# Altium PCB Valve.PcbDoc
Units mm, origin at the board's own origin, x right, y up, seen from the top; angles counter-clockwise.
Board outline 70.25 x 100.25 mm, 2 copper layers (Top Layer, Bottom Layer); 67 components, 49 nets, 227 pads, 31 vias.
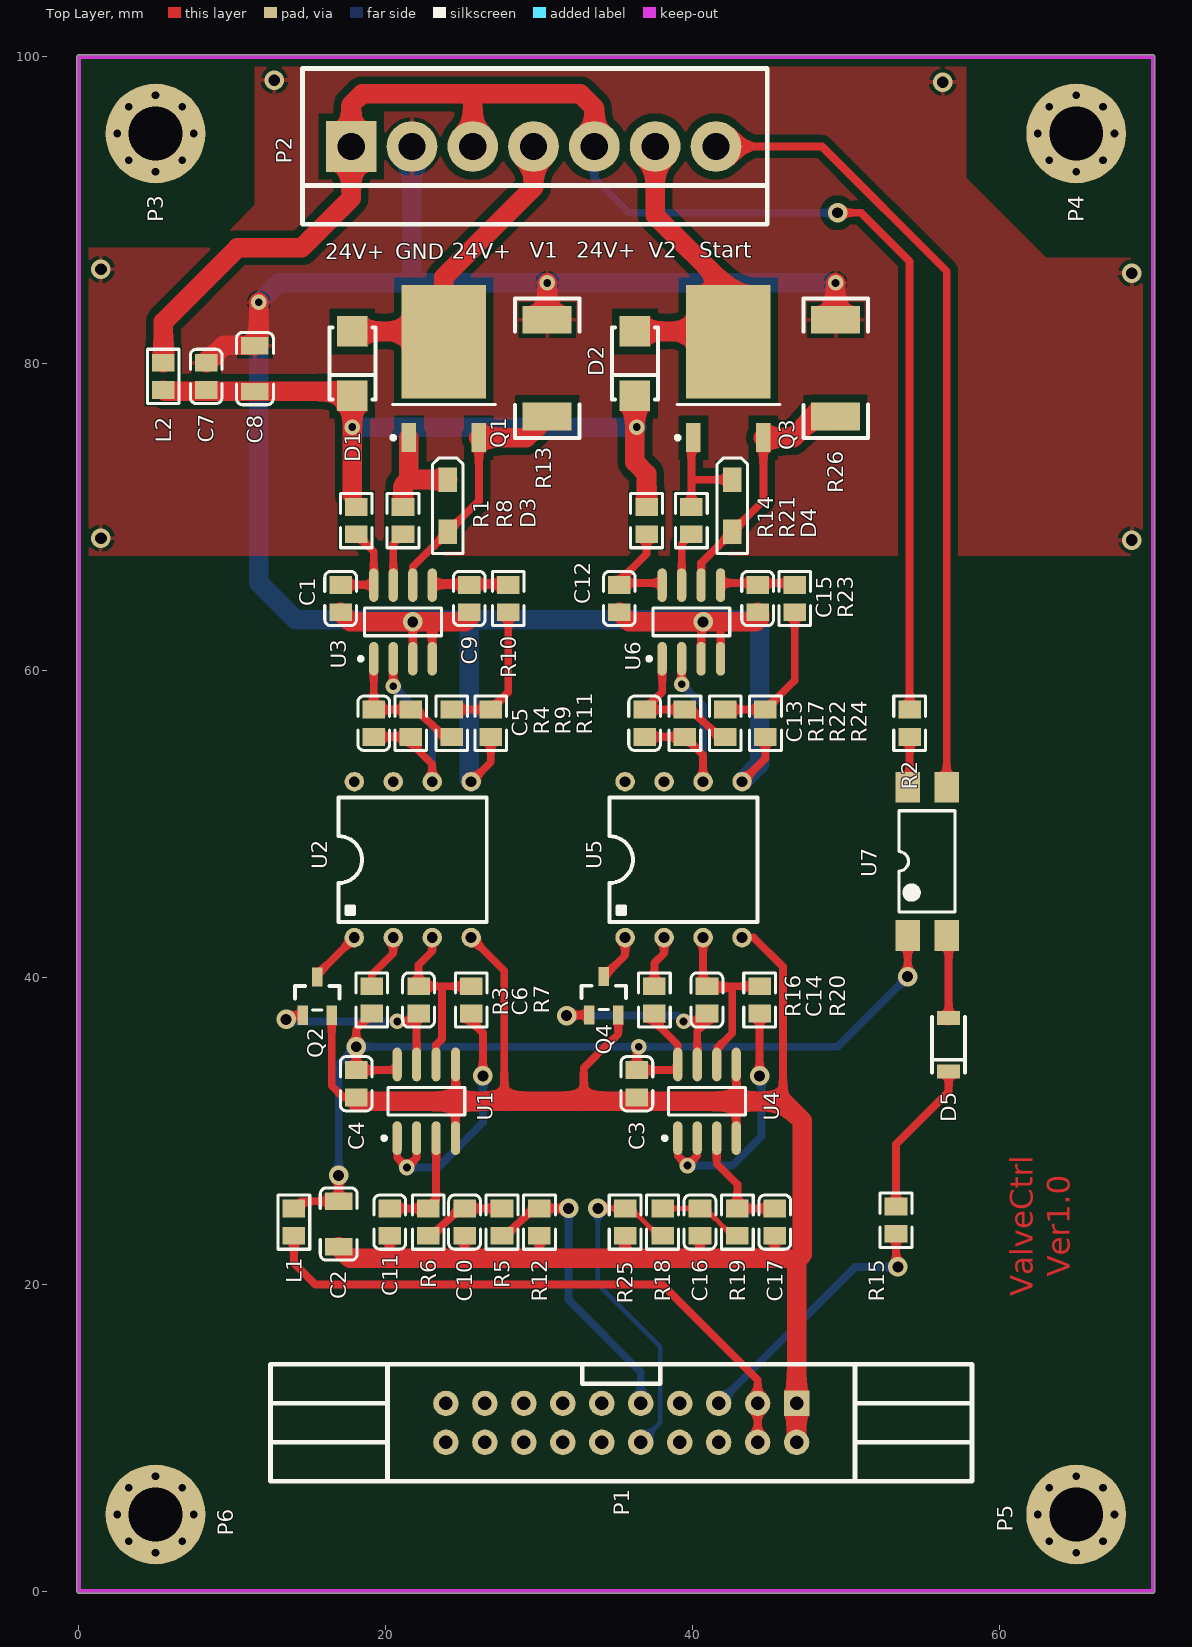
[diagram p0: Top Layer view]
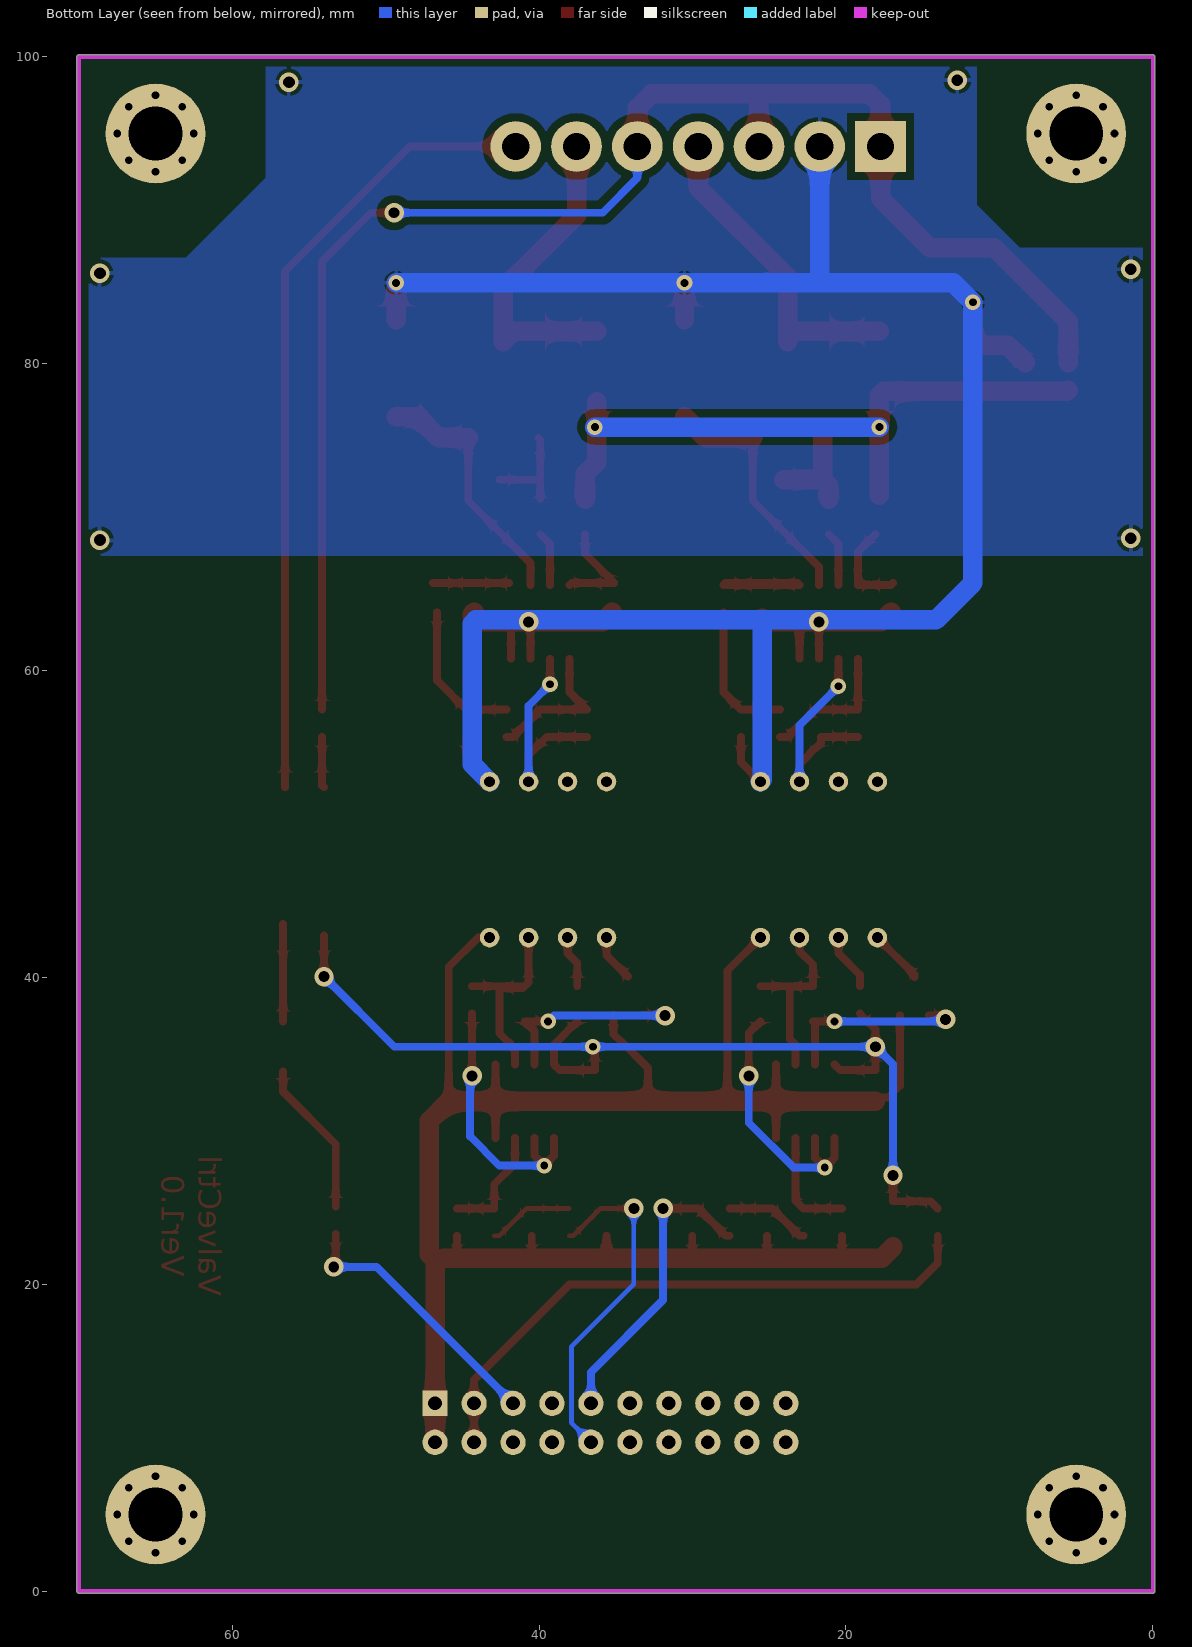
[diagram p1: Bottom Layer view, seen from below]
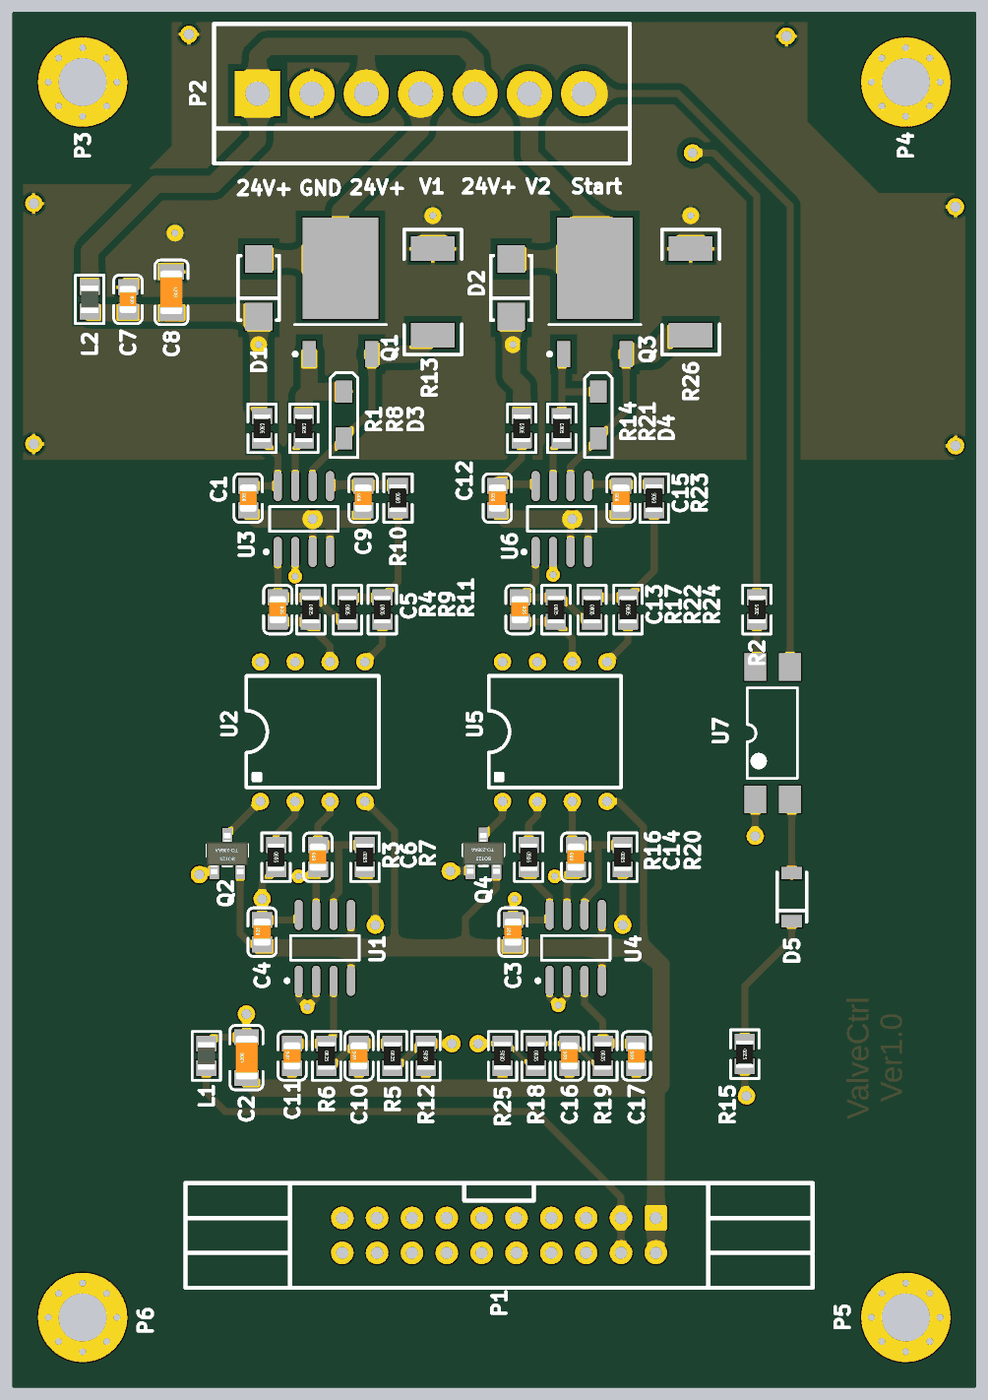
[diagram p2: 3D render of the assembled board from above, using the file's embedded part models]

## Layer stack, top to bottom
Top Solder: solder mask 0.0102, Solder Resist, Dk 3.5
Top Layer: signal copper 0.0356
Dielectric1: dielectric 0.32, FR-4, Dk 4.8
Bottom Layer: signal copper 0.0356
Bottom Solder: solder mask 0.0102, Solder Resist, Dk 3.5

## Board outline
-0.127,0 ccw(c0,0) 0,-0.127 70,-0.127 ccw(c70,0) 70.127,0 70.127,100 ccw(c70,100) 70,100.127 0,100.127 ccw(c0,100) -0.127,100

## Design rules (kind name [scope] priority, off if disabled: settings)
Clearance Clearance_1 [InPolygon] p1: gap=0.508
Clearance [All] p2: gap=0.254
ComponentClearance [All] p1: gap=0 collisioncheckmode=3 verticalgap=0 showdistances=FALSE
PolygonConnect [All] p1: connectstyle=Relief reliefconductorwidth=0.254 reliefentries=4 polygonreliefangle="90 Angle" airgapwidth=0.254
RoutingVias [All] p1: holewidth=0.711 width=1.27 viastyle="Through Hole" minholewidth=0.508 minwidth=1.016 maxholewidth=0.711 maxwidth=2.54
SilkToSolderMaskClearance SilkscreenOverComponentPads [IsPad] p1: minsilkscreentomaskgap=0.254 clearancetoexposedcopper=TRUE
SolderMaskExpansion [All] p1: expansion=0.102
Width [All] p1: maxlimit=2.54 minlimit=0.254 preferedwidth=0.254
28 further rules are at their usual default settings.

## Components (designator, comment, footprint, x,y, rotation, side; value= is the part's Value field where it differs from the comment)
C1 "100nF" 0805_C 17.064,64.695 r90 top
C2 "10uF" 1206_C 16.937,23.927 r90 top
C3 "100nF" 0805_C 36.368,33.07 r90 top
C4 "100nF" 0805_C 18.08,33.07 r90 top
C5 "1nF" 0805_C 19.223,56.567 r270 top
C6 "1nF" 0805_C 22.144,38.531 r90 top
C7 "100nF" 0805_C 8.301,79.171 r270 top
C8 "10uF" 1206_C 11.476,79.68 r270 top
C9 "10nF" 0805_C 25.446,64.695 r90 top
C10 "100nF" 0805_C 25.141,24.054 r90 top
C11 "100nF" 0805_C 20.264,24.054 r90 top
C12 "100nF" 0805_C 35.225,64.695 r90 top
C13 "1nF" 0805_C 36.876,56.567 r270 top
C14 "1nF" 0805_C 40.94,38.531 r90 top
C15 "10nF" 0805_C 44.242,64.695 r90 top
C16 "100nF" 0805_C 40.483,24.054 r90 top
C17 "100nF" 0805_C 45.36,24.054 r90 top
D1 "M7" SMA(DO-214AC)_S1 17.826,80.007 r90 top
D2 "M7" SMA(DO-214AC)_S1 36.241,80.007 r90 top
D3 "SMF12" SOD-123 24.049,69.041 r90 top
D4 "SMF12" SOD-123 42.591,69.041 r90 top
D5 "LL4148" LL-34 56.688,35.611 r90 top
L1 "GZ2012D101TF" 0805_L 14.016,24.054 r90 top
L2 "GZ2012D101TF" 0805_L 5.507,79.171 r90 top
P1 "Header 10X2" IDC20-EJ 46.782,12.243 r180 top
P2 "Header 7" 3.96-7 17.75,94.158 r180 top
P3 "Header 9" LK 5,95 r0 top
P4 "Header 9" LK 65,95 r0 top
P5 "Header 9" LK 65,5 r0 top
P6 "Header 9" LK 5,5 r0 top
Q1 "IRLR024N" TO-252AA_N 23.795,79.68 r90 top
Q2 "MMBT5551  G1" SOT-23(SOT-23-3) 15.54,38.786 r270 top
Q3 "IRLR024N" TO-252AA_N 42.337,79.68 r90 top
Q4 "MMBT5551  G1" SOT-23(SOT-23-3) 34.209,38.806 r270 top
R1 "100Ω" 0805_R 18.08,69.775 r270 top
R2 "1KΩ" 0805_R 54.148,56.565 r90 top
R3 "100Ω" 0805_R 19.096,38.531 r270 top
R4 "100K" 0805_R 21.636,56.567 r270 top
R5 "100K" 0805_R 27.58,24.054 r270 top
R6 "100K" 0805_R 22.779,24.054 r270 top
R7 "51KΩ" 0805_R 25.573,38.531 r270 top
R8 "100K" 0805_R 21.128,69.775 r270 top
R9 "5.1KΩ" 0805_R 24.303,56.567 r270 top
R10 "100K" 0805_R 27.986,64.695 r90 top
R11 "10KΩ" 0805_R 26.843,56.567 r270 top
R12 "100K" 0805_R 30.018,24.054 r90 top
R13 "33R" R2512 30.526,82.855 r270 top
R14 "100Ω" 0805_R 37.003,69.775 r270 top
R15 "330Ω" 0805_R 53.259,24.181 r270 top
R16 "100Ω" 0805_R 37.511,38.531 r270 top
R17 "100K" 0805_R 39.501,56.567 r270 top
R18 "100K" 0805_R 38.044,24.054 r270 top
R19 "100K" 0805_R 42.921,24.054 r270 top
R20 "51KΩ" 0805_R 44.369,38.531 r270 top
R21 "100K" 0805_R 39.924,69.775 r270 top
R22 "5.1KΩ" 0805_R 42.125,56.567 r270 top
R23 "100K" 0805_R 46.655,64.694 r90 top
R24 "10KΩ" 0805_R 44.75,56.567 r270 top
R25 "100K" 0805_R 35.606,24.054 r90 top
R26 "33R" R2512 49.322,82.855 r270 top
U1 "LM2904D" 751-02_N 22.652,31.928 r90 top
U2 "HCNR201" DIP-8-1 17.953,42.596 r90 top
U3 "LM2904VQDR" 751-02_N 21.128,63.17 r90 top
U4 "LM2904D" 751-02_N 40.94,31.928 r90 top
U5 "HCNR201" DIP-8-1 35.606,42.596 r90 top
U6 "LM2904VQDR" 751-02_N 39.924,63.17 r90 top
U7 "TLP785(GB-TP6,F(C" TLP785(LF6) 55.291,47.565 r90 top

## Footprints (in the part's own frame and the unit in brackets; to place one, negate y for a bottom-side part, rotate by r counter-clockwise, add the part's x,y. Pads: shape width x height; smd on the part's side, far side on the other; paste and mask are expansions set on the pad)
3.96-7 [mil]
  rect 130x130 hole 70: 1(0,0)
  round 130 hole 70: 2(-156,0) 3(-312,0) 4(-468,0) 5(-624,0) 6(-780,0) 7(-936,0)
  silkscreen extent -1068,-200 125,200
751-02_N [mm] "SOIC, 8-Leads, Body 4.9x3.9mm, Pitch 1.27mm, IPC Medium Density"
  oval 2.2x0.6 smd: 1(-2.4,1.905) 2(-2.4,0.635) 3(-2.4,-0.635) 4(-2.4,-1.905) 5(2.4,-1.905) 6(2.4,-0.635) 7(2.4,0.635) 8(2.4,1.905)
  silkscreen extent -2.52,-2.5 0.9,2.88, body extent -1.95,-2.45 1.95,2.45, height 1.75
0805_C [mm]
  rect 1.16x1.47 smd: 1(-0.89,0) 2(0.89,0)
  silkscreen extent -1.77,-1.04 1.77,1.04, body extent -1,-0.62 1,0.63, height 0.77
0805_L [mm]
  rect 1.16x1.47 smd: 1(-0.89,0) 2(0.89,0)
  silkscreen extent -1.77,-1.04 1.77,1.03, body extent -1.02,-0.64 1.03,0.64, height 0.6
0805_R [mm]
  rect 1.16x1.47 smd: 1(-0.89,0) 2(0.89,0)
  silkscreen extent -1.77,-1.04 1.77,1.03, body extent -1,-0.62 1,0.63, height 0.49
1206_C [mm]
  rect 1.13x1.8 smd: 1(-1.49,0) 2(1.49,0)
  silkscreen extent -2.36,-1.2 2.35,1.2, body extent -1.6,-0.81 1.6,0.79, height 1
DIP-8-1 [mil]
  round 50 hole 28: 1(0,0) 2(0,-100) 3(0,-200) 4(0,-300) 5(400,-300) 6(400,-200) 7(400,-100) 8(400,0)
  silkscreen extent 40,-340 360,40
IDC20-EJ [mil]
  rect 65x65 hole 35: 1(0,0)
  round 65 hole 35: 2(0,100) 3(100,0) 4(100,100) 5(200,0) 6(200,100) 7(300,0) 8(300,100) 9(400,0) 10(400,100) 11(500,0) 12(500,100) 13(600,0) 14(600,100) 15(700,0) 16(700,100) 17(800,0) 18(800,100) 19(900,0) 20(900,100)
  silkscreen extent -450,-100 1350,200
LK [mm]
  round 6.5 hole 3.5: 1(0,0)
  round 1 hole 0.5: 2(0,2.5) 3(2.5,0) 4(0,-2.5) 5(-1.75,-1.75) 6(-1.75,1.75) 7(1.75,1.75) 8(1.75,-1.75) 9(-2.5,0)
LL-34 [mm]
  rect 0.9x1.5 smd: 1(1.75,0) 2(-1.75,0)
  silkscreen extent -1.8,-1.08 1.8,1.08
R2512 [mm]
  rect 1.8x3.2 smd: 1(0,0) 2(6.3,0)
  silkscreen extent -1.4,-2.1 7.7,2.1
SMA(DO-214AC)_S1 [mm]
  rect 2x2 smd: 1(2.1,0) 2(-2.1,0)
  silkscreen extent -2.35,-1.5 2.35,1.5
SOD-123 [mm]
  rect 1.6x1.2 smd: 1(0,0) 2(3.4,0)
  silkscreen extent -1.4,-1 4.8,1
SOT-23(SOT-23-3) [mm]
  rect 1.25x0.7 smd: 1(1.25,-0.95) 2(1.25,0.95) 3(-1.25,0)
  silkscreen extent -0.65,-1.46 0.9,1.46, body extent -1.5,-1.5 1.5,1.5, height 1.3
TLP785(LF6) [mm] "TOSHIBA Photocoupler"
  rect 2x1.6 smd: 1(-4.826,1.27) 2(-4.826,-1.27) 3(4.826,-1.27) 4(4.826,1.27)
  silkscreen extent -3.3,-1.8 3.3,1.85, body extent -3.15,-2.5 3.15,2.5, height 5.6
TO-252AA_N [mm] "D-PAK, 4-Leads, Body 6.1x6.5mm, Pitch 2.28mm, Lead Span 9.9mm, IPC Medium Density"
  rect 1.9x0.95 smd: 1(-4.5,2.28) 3(-4.5,-2.28)
  rect 7.4x5.5 smd: 4(1.75,0)
  silkscreen extent -4.62,-3.35 -2.35,3.43, body extent -2.25,-3.37 4.1,3.37, height 2.38

## Part data
C1 C3 C4 C7 C10 C11 C12 C16 C17: library part "0805 100nF(104) 10% 50V", "贴片电容"
C2 C8: library part "1206 10uF (106) 10% 50V", "贴片电容"
C5 C6 C13 C14: library part "0805 1nF (102) 10% 50V", "贴片电容"
C9 C15: library part "0805 10nF (103) 10% 50V", "贴片电容"
D1 D2: library part "SMA(DO-214AC) M7", "二极管"
D3 D4: library part "D Zener", "Zener Diode"
D5: library part "LL-34 LL4148 LL-34 1206", "开关二极管"
L1 L2: library part "0805 100Ω 25% 100MHz", "贴片磁珠"
P1: "Header, 10-Pin, Dual row"
P2: "Header, 7-Pin"
P3 P4 P5 P6: "Header, 9-Pin"
Q1 Q3: "HEXFET Power MOSFET"
Q2 Q4: library part "SOT-23 MMBT5551  G1", "三极管"
R1 R3 R14 R16: library part "0805 100Ω (1000) 1%", "贴片电阻"
R2: library part "0805 1KΩ (1001) 1%", "贴片电阻"
R4 R5 R6 R8 R10 R12 R17 R18 R19 R21 R23 R25: library part "0805 100KΩ (1003) 1%", "贴片电阻"
R7 R20: library part "0805 51KΩ (5102) 1%", "贴片电阻"
R9 R22: library part "0805 5.1KΩ (5101) 1%", "贴片电阻"
R11 R24: library part "0805 10KΩ (1002) 1%", "贴片电阻"
R13 R26: library part Res2, "Resistor"
R15: library part "0805 330Ω (3300) 1%", "贴片电阻"
U1 U4: "Dual Low-Power Operational Amplifier"
U3 U6: library part LM2904D, "Dual Low-Power Operational Amplifier"
U7: library part TLP521

## Via types
v1: diameter 1.27, hole 0.711, Top Layer to Bottom Layer, 13 vias
v2: diameter 1.016, hole 0.508, Top Layer to Bottom Layer, 12 vias
v3: diameter 1.27, hole 0.762, Top Layer to Bottom Layer, 6 vias

## Nets (pads, with @x,y where several pads share a name; then routed paths per layer and width w, separated by ;. In a path a pad name is that pad's centre, name@x,y a point inside that pad or via, vN(x,y) a via of type N, cw(c..) or ccw(c..) an arc to the next point about the centre after c; other vN are vias at no path point)
24V: L2.2 P2.1 P2.3 P2.5 R2.2 | length 101
  Top Layer w0.508: v1(49.449,89.84) 50.973,89.84 54.148,86.665 R2.2
  Top Layer w1.27: L2.2 5.507,82.728 10.333,87.554 14.524,87.554 17.75,90.78 P2.1 17.75,96.876 18.461,97.587 26.081,97.587 ; P2.3 25.674,97.18 26.081,97.587 ; P2.5 33.599,96.673 32.685,97.587 26.081,97.587
  Bottom Layer w0.508: P2.5 33.599,92.101 35.86,89.84 v1(49.449,89.84)
A+5V: C2.2 C3.2 C4.2 L1.2 R3.2 R16.2 U1.8 U4.8 U7.1 | length 68.9
  Top Layer w0.508: L1.2 14.489,25.417 C2.2 v1(16.937,27.102) ; R3.2 18.08,36.625 v1(18.08,35.484) C4.2 20.379,33.96 U1.8 ; v2(36.495,35.484) 36.495,35.458 36.368,35.331 C3.2 38.667,33.96 U4.8 39.035,35.611 R16.2@37.511,37.135 ; v1(54.021,40.056) U7.1
  Bottom Layer w0.508: v1(16.937,27.102) 16.937,34.341 v1(18.08,35.484) v2(36.495,35.484) 49.449,35.484 v1(54.021,40.056)
AGND: C2.1 C3.1 C4.1 C10.1 C11.1 C16.1 C17.1 P1.1 P1.2 Q2.2 Q4.2 R12.1 R25.1 U1.4 U1.5 U2.4 U4.4 U4.5 U5.4 | length 135.2
  Top Layer w0.508: Q2.2 16.49,32.944 17.254,32.18 C4.1 ; 20.264,21.793 C11.1 ; U1.5 24.557,31.928 U1.4 U1.4@24.57,29.515 ; 25.128,21.768 25.141,21.781 C10.1 ; U2.4 27.732,40.437 27.732,31.928 ; 30.018,21.768 R12.1 ; 32.905,31.928 32.905,34.093 34.677,35.865 34.717,35.865 35.159,36.307 Q4.2 ; 35.606,21.895 R25.1 ; 40.483,21.781 C16.1 ; U4.4 42.845,31.928 U4.5 ; U5.4 43.988,42.596 45.893,40.691 45.893,31.928 ; 45.36,21.87 C17.1
  Top Layer w1.27: C2.1 17.679,21.695 35.806,21.695 ; C4.1@18.08,31.928 24.557,31.928 27.732,31.928 32.905,31.928 42.845,31.928 45.893,31.928 47.163,30.658 47.163,21.949 46.782,21.568 P1.1 P1.2 ; 35.606,21.895 35.806,21.695 ; 46.201,21.695 35.806,21.695
GND_24V: C1.1 C7.1 C8.1 C9.1 C12.1 C15.1 P2.2 R11.2 R13.1 R24.2 R26.1 U2.5 U3.3 U3.4 U5.5 U6.3 U6.4 | length 166.9
  Top Layer w0.508: U3.3 v1@21.763,62.789 ; U3.4 23.033,63.17 ; U2.5 26.843,54.026 R11.2 ; U6.3 40.559,63.043 v1(40.686,63.17) ; U6.4 41.829,63.043 ; U5.5 44.75,54.28 R24.2
  Top Layer w1.27: C7.1 9.444,81.204 C8.1@11.51,81.204 ; C8.1 C8.1@11.51,81.204 ; v2(11.73,83.998) 11.73,81.331 11.637,81.331 C8.1@11.51,81.204 ; C1.1 17.699,63.17 v1(21.763,63.17) 23.033,63.17 25.192,63.17 C9.1@25.446,63.424 ; R13.1 v2(30.526,85.268) ; C12.1 35.86,63.17 v1(40.686,63.17) 44.115,63.17 44.369,63.424 44.369,63.678 C15.1 ; R26.1 v2(49.322,85.268)
  Bottom Layer w1.27: P2.2 21.712,85.573 22.017,85.268 ; 25.167,85.293 25.192,85.268 ; U2.5 25.446,52.883 25.446,63.17 25.319,63.297 ; U5.5 44.369,53.899 44.369,63.043 44.115,63.297 25.319,63.297 ; v2(49.322,85.268) v2(30.526,85.268) 25.192,85.268 ; 22.017,85.268 25.192,85.268 ; 22.017,85.268 13,85.268 v2(11.73,83.998) 11.73,65.71 14.143,63.297 25.319,63.297
  other v3: 68.626,68.504 1.443,68.631 68.626,85.903 1.443,86.157 56.307,98.349 12.746,98.476
NetC1_2: C1.2 R1.2 U3.8 | length 6.1
  Top Layer w0.508: C1.2@16.937,65.71 C1.2@17.063,65.584 ; C1.2 19.208,65.585 U3.8 19.223,67.742 R1.2
NetC5_1: C5.1 R4.1 R9.2 U3.1 | length 9.1
  Top Layer w0.508: U3.1 C5.1 R4.1 22.015,57.457 23.795,55.677 R9.2
NetC5_2: C5.2 R4.2 U2.6 U3.2 | length 15
  Top Layer w0.508: C5.2 R4.2 21.636,55.296 23.033,53.899 U2.6 ; v2(20.493,58.979) U3.2
  Bottom Layer w0.508: v2(20.493,58.979) 23.033,56.439 U2.6
NetC6_1: C6.1 Q2.1 U1.7 | length 12.7
  Top Layer w0.508: v1(13.508,37.262) 13.782,37.536 Q2.1 ; v2(20.747,37.135) 22.144,37.135 22.017,37.008 U1.7
  Bottom Layer w0.508: v1(13.508,37.262) 13.635,37.135 15.799,37.135 v2(20.747,37.135)
NetC6_2: C6.2 R7.1 U1.6 U2.3 | length 12.3
  Top Layer w0.508: U2.3 23.033,41.707 22.144,40.818 C6.2 23.541,39.421 ; U1.6 23.287,35.611 23.668,35.992 23.668,39.294 23.541,39.421 ; R7.1 23.541,39.421
NetC7_2: C7.2 C8.2 D1.2 D2.2 L2.1 R1.1 R14.1 | length 44.1
  Top Layer w0.508: 17.826,71.425 R1.1@18.08,71.171
  Top Layer w1.27: L2.1 5.598,78.19 C8.2 17.543,78.19 D1.2 ; 17.826,71.425 v2(17.826,75.87) D1.2@17.826,77.507 ; D2.2@36.241,77.507 36.241,73.584 37.003,72.822 R14.1@37.003,71.171
  Bottom Layer w1.27: v2(17.826,75.87) v2(36.368,75.87)
NetC9_2: C9.2 R10.2 U3.5 | length 9.9
  Top Layer w0.508: R10.2 27.865,65.706 R10.2@27.859,65.706 ; R10.2@27.859,65.706 23.169,65.706 U3.5 27.723,65.57 R10.2@27.859,65.706
NetC10_2: C10.2 R5.1 R6.2 | length 5.5
  Top Layer w0.508: R6.2 23.032,23.164 24.022,24.154 ; 24.022,24.154 24.812,24.944 R5.1
NetC11_2: C11.2 R6.1 U1.3 | length 7.3
  Top Layer w0.508: C11.2 R6.1 23.287,25.452 U1.3
NetC12_2: C12.2 R14.2 U6.8 | length 6.9
  Top Layer w0.508: R14.2 37.003,67.615 35.098,65.71 37.879,65.71 U6.8
NetC13_1: C13.1 R17.1 R22.2 U6.1 | length 9.8
  Top Layer w0.508: U6.1 38.019,58.6 C13.1 R17.1 39.922,57.457 41.702,55.677 R22.2
NetC13_2: C13.2 R17.2 U5.6 U6.2 | length 14.6
  Top Layer w0.508: C13.2 R17.2 40.686,54.492 U5.6 ; v2(39.289,59.106) U6.2
  Bottom Layer w0.508: v2(39.289,59.106) 40.686,57.709 U5.6
NetC14_1: C14.1 Q4.1 U4.7 | length 13.9
  Top Layer w0.508: v1(31.796,37.516) 31.836,37.556 Q4.1 ; v2(39.416,37.135) 40.94,37.135 40.305,36.5 U4.7
  Bottom Layer w0.508: v1(31.796,37.516) 39.035,37.516 v2(39.416,37.135)
NetC14_2: C14.2 R20.1 U4.6 U5.3 | length 13.8
  Top Layer w0.508: U5.3 40.686,39.675 C14.2 ; U4.6 41.575,35.357 42.591,36.373 42.591,39.294 41.067,39.294 C14.2 ; R20.1 C14.2
NetC15_2: C15.2 R23.2 U6.5 | length 4.9
  Top Layer w0.508: U6.5@41.965,65.706 R23.2@46.909,65.706
NetC16_2: C16.2 R18.1 R19.2 | length 5.6
  Top Layer w0.305: R18.1 C16.2 40.812,24.944 42.592,23.164 R19.2
NetC17_2: C17.2 R19.1 U4.3 | length 7.6
  Top Layer w0.508: U4.3 41.575,27.864 42.921,26.518 R19.1 C17.2
NetD1_1: D1.1 P2.4 Q1.4 | length 20.4
  Top Layer w1.27: D1.1 Q1.4@23.118,82.107 ; Q1.4 23.795,85.649 29.637,91.491 P2.4
NetD2_1: D2.1 P2.6 Q3.4 | length 21.1
  Top Layer w1.27: D2.1 41.66,82.107 Q3.4 42.337,84.887 37.562,89.662 P2.6
NetD3_1: D3.1 Q1.3 R13.2 U3.6 | length 16.4
  Top Layer w0.508: U3.6 21.763,66.755 D3.1 26.075,71.067 Q1.3
  Top Layer w1.27: Q1.3 29.151,75.18 R13.2
NetD3_2: D3.2 Q1.1 R8.1 | length 6.7
  Top Layer w1.27: R8.1@21.128,71.171 21.128,72.06 21.509,72.441 ; Q1.1 21.509,75.174 21.509,72.441 ; D3.2 21.509,72.441
NetD4_1: D4.1 Q3.3 R26.2 U6.6 | length 16.6
  Top Layer w0.508: U6.6 40.559,67.009 D4.1 44.617,71.067 Q3.3
  Top Layer w1.27: Q3.3 46.55,75.18 47.925,76.555 R26.2
NetD4_2: D4.2 Q3.1 R21.1 | length 6.8
  Top Layer w0.508: R21.1@39.924,71.171 39.924,72.568 ; Q3.1 39.924,75.047 39.924,72.568 ; D4.2 40.051,72.441 39.924,72.568
NetD5_1: D5.1 U7.2 | length 6.3
  Top Layer w0.508: D5.1@56.688,37.135 U7.2@56.688,43.485
NetD5_2: D5.2 R15.1 | length 10.2
  Top Layer w0.508: R15.1 53.259,29.134 56.688,32.563 D5.2
NetL1_1: L1.1 P1.3 P1.4 | length 39.2
  Top Layer w0.508: L1.1 14.016,21.387 15.413,19.99 38.019,19.99 44.242,13.767 P1.3 P1.4
NetP1_5: P1.5 R15.2 | length 17.6
  Top Layer w0.508: R15.2 53.259,21.26 v1(53.386,21.133)
  Bottom Layer w0.508: P1.5 50.592,21.133 v1(53.386,21.133)
NetP1_9: P1.9 R5.2 R12.2 | length 19.7
  Top Layer w0.508: R5.2 27.833,23.164 29.613,24.944 R12.2 v1(31.922,24.944)
  Bottom Layer w0.508: v1(31.922,24.944) 31.922,18.975 36.622,14.275 P1.9
NetP1_10: P1.10 R18.2 R25.2 | length 22.4
  Top Layer w0.305: v1(33.829,24.944) R25.2 35.986,24.944 37.766,23.164 R18.2
  Bottom Layer w0.305: v1(33.829,24.944) 33.829,19.989 37.892,15.926 37.892,10.973 P1.10
NetP2_7: P2.7 U7.3 | length 52
  Top Layer w0.508: P2.7 48.433,94.158 56.561,86.03 U7.3
NetP3_1: P3.1 P3.2 P3.3 P3.4 P3.5 P3.6 P3.7 P3.8 P3.9
NetP4_1: P4.1 P4.2 P4.3 P4.4 P4.5 P4.6 P4.7 P4.8 P4.9
NetP5_1: P5.1 P5.2 P5.3 P5.4 P5.5 P5.6 P5.7 P5.8 P5.9
NetP6_1: P6.1 P6.2 P6.3 P6.4 P6.5 P6.6 P6.7 P6.8 P6.9
NetQ2_3: Q2.3 U2.1 | length 3.6
  Top Layer w0.508: Q2.3 15.54,40.183 U2.1
NetQ4_3: Q4.3 U5.1 | length 3.1
  Top Layer w0.508: Q4.3 35.606,41.453 U5.1
NetR2_1: R2.1 U7.4 | length 3.3
  Top Layer w0.508: U7.4 54.148,52.518 R2.1
NetR3_1: R3.1 U2.2 | length 3.8
  Top Layer w0.508: R3.1 19.096,40.183 20.493,41.58 U2.2
NetR7_2: R7.2 U1.1 U1.2 | length 17.4
  Top Layer w0.508: U1.1 20.747,28.245 v2(21.382,27.61) 22.017,28.245 U1.2 ; R7.2@25.573,37.135 26.335,36.373 v1(26.335,33.579)
  Bottom Layer w0.508: v2(21.382,27.61) 23.414,27.61 26.335,30.531 v1(26.335,33.579)
NetR8_2: R8.2 U3.7 | length 3.6
  Top Layer w0.508: U3.7 20.493,68.249 R8.2
NetR9_1: R9.1 R10.1 R11.1 | length 9.4
  Top Layer w0.508: R9.1 R11.1 27.986,58.6 R10.1
NetR16_1: R16.1 U5.2 | length 3.4
  Top Layer w0.508: R16.1 37.511,40.945 38.146,41.58 U5.2
NetR20_2: R20.2 U4.1 U4.2 | length 17.8
  Top Layer w0.508: U4.1 39.035,28.372 v2(39.67,27.737) 40.305,28.372 U4.2 ; v1(44.369,33.579) R20.2
  Bottom Layer w0.508: v2(39.67,27.737) 42.591,27.737 44.496,29.642 44.496,33.452 v1(44.369,33.579)
NetR21_2: R21.2 U6.7 | length 3.6
  Top Layer w0.508: U6.7 39.289,68.25 R21.2
NetR22_1: R22.1 R23.1 R24.1 | length 9.8
  Top Layer w0.508: R22.1 R24.1 46.655,59.362 R23.1
pads on no net: P1.6 P1.7 P1.8 P1.11 P1.12 P1.13 P1.14 P1.15 P1.16 P1.17 P1.18 P1.19 P1.20 U2.7 U2.8 U5.7 U5.8

## Polygon pours and split planes (outlines as drawn)
GND_24V on Top Layer "NONET_L-01_P-001" (solid, remove dead copper, pour order 2): 11.476,99.873 57.831,99.873 57.831,92.126 63.038,86.919 70.023,86.919 70.023,67.511 70,67.488 -0.208,67.488 -0.208,87.554 8.682,87.554 11.476,90.348
GND_24V on Bottom Layer "NONET_L-01_P-001" (solid, remove dead copper, pour order 1): 11.476,99.873 57.831,99.873 57.831,92.126 63.038,86.919 70.023,86.919 70.023,67.511 70,67.488 -0.208,67.488 -0.208,87.554 8.682,87.554 11.476,90.348

## Keep-outs
Keep-Out Layer:
  lines w0.254: 0,0 70,0 70,100 0,100 0,0

## Other copper
Top Layer:
  text "Ver1.0" at 65.07,20.498 h2.54 r90
  text "ValveCtrl" at 62.657,19.228 h2.54 r90

## Silkscreen, mask and mechanical layers (free items; w line width, h text height)
Top Overlay:
  text "V1" at 29.383,86.919 h1.02
  text "24V+" at 32.431,86.919 h1.02
  text "V2" at 37.13,86.919 h1.02
  text "Start" at 40.432,86.919 h1.02
  text "24V+" at 24.303,86.848 h1.02
  text "24V+" at 16.048,86.792 h1.02
  text "GND" at 20.62,86.792 h1.02